# Allegro board RPI_ZM5202.brd
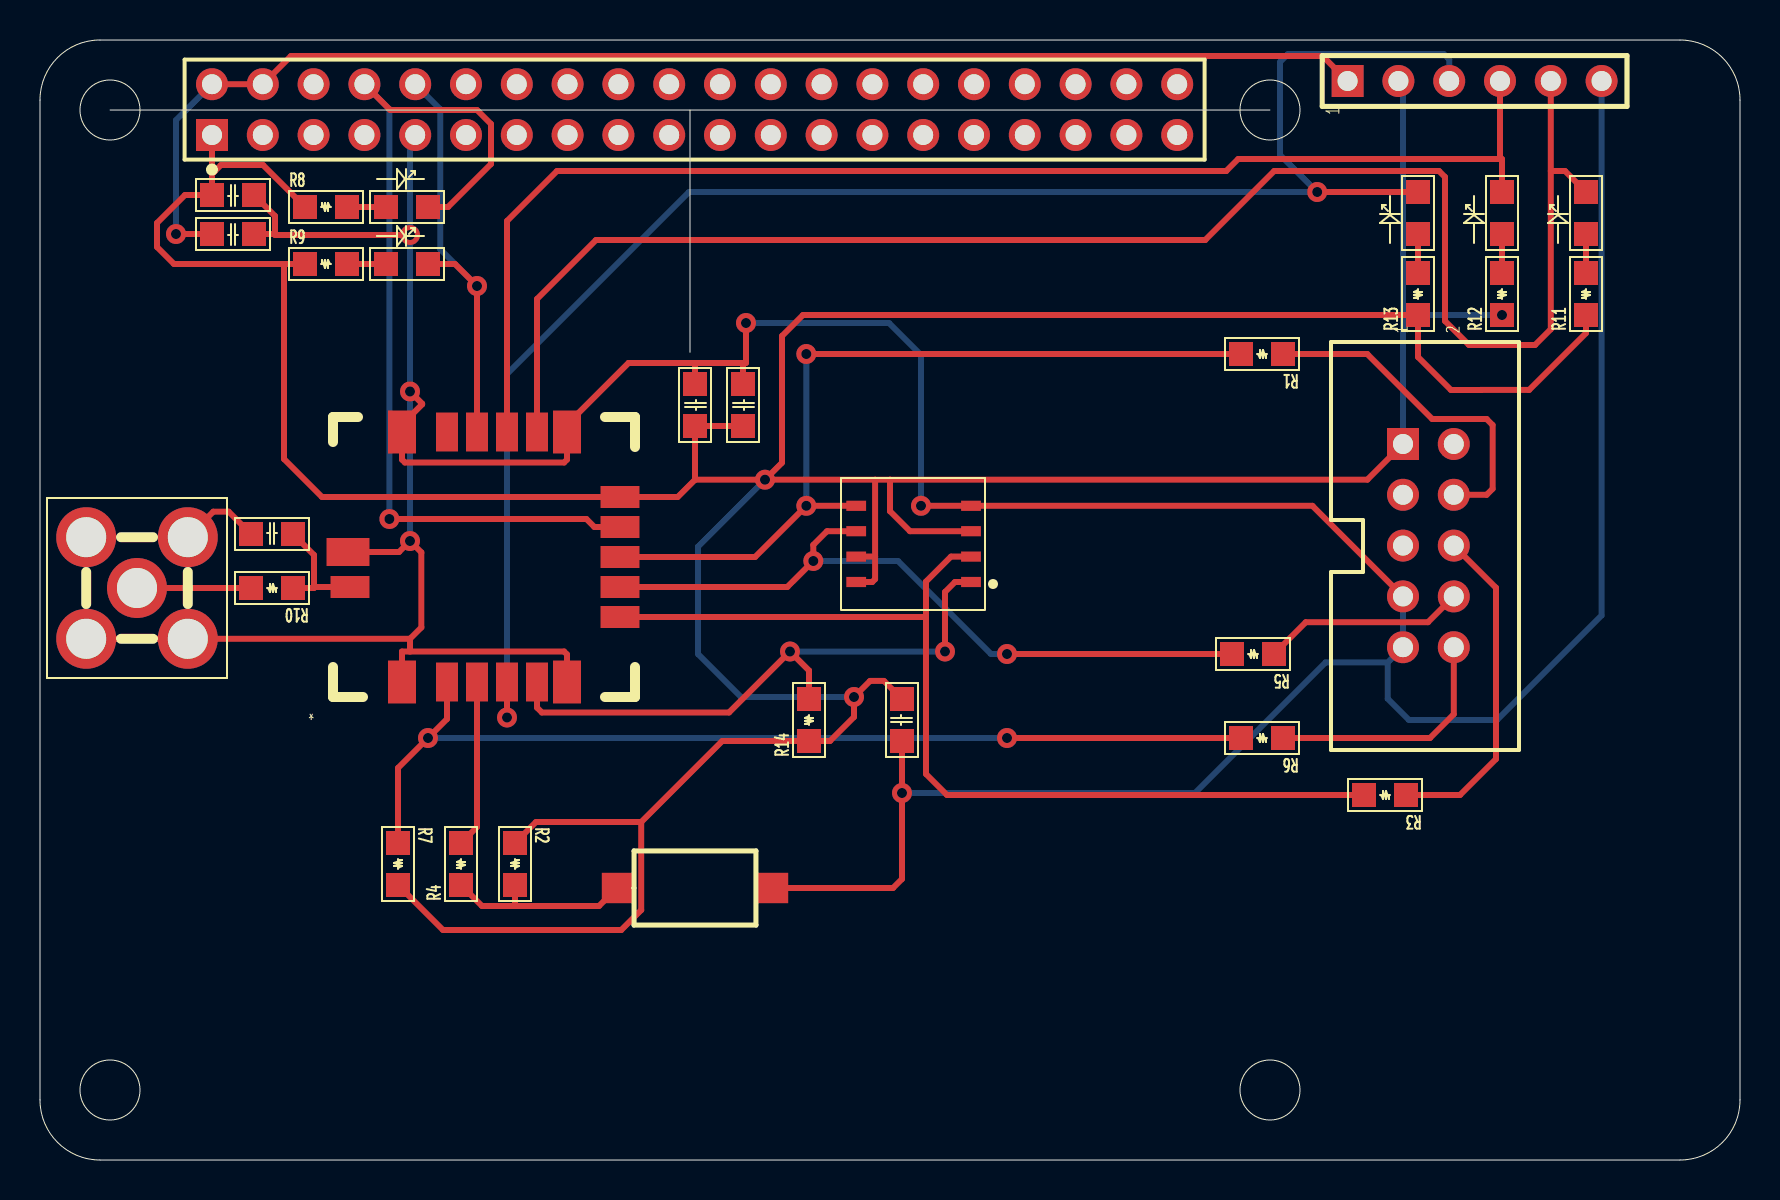
[diagram p0: board, top side]
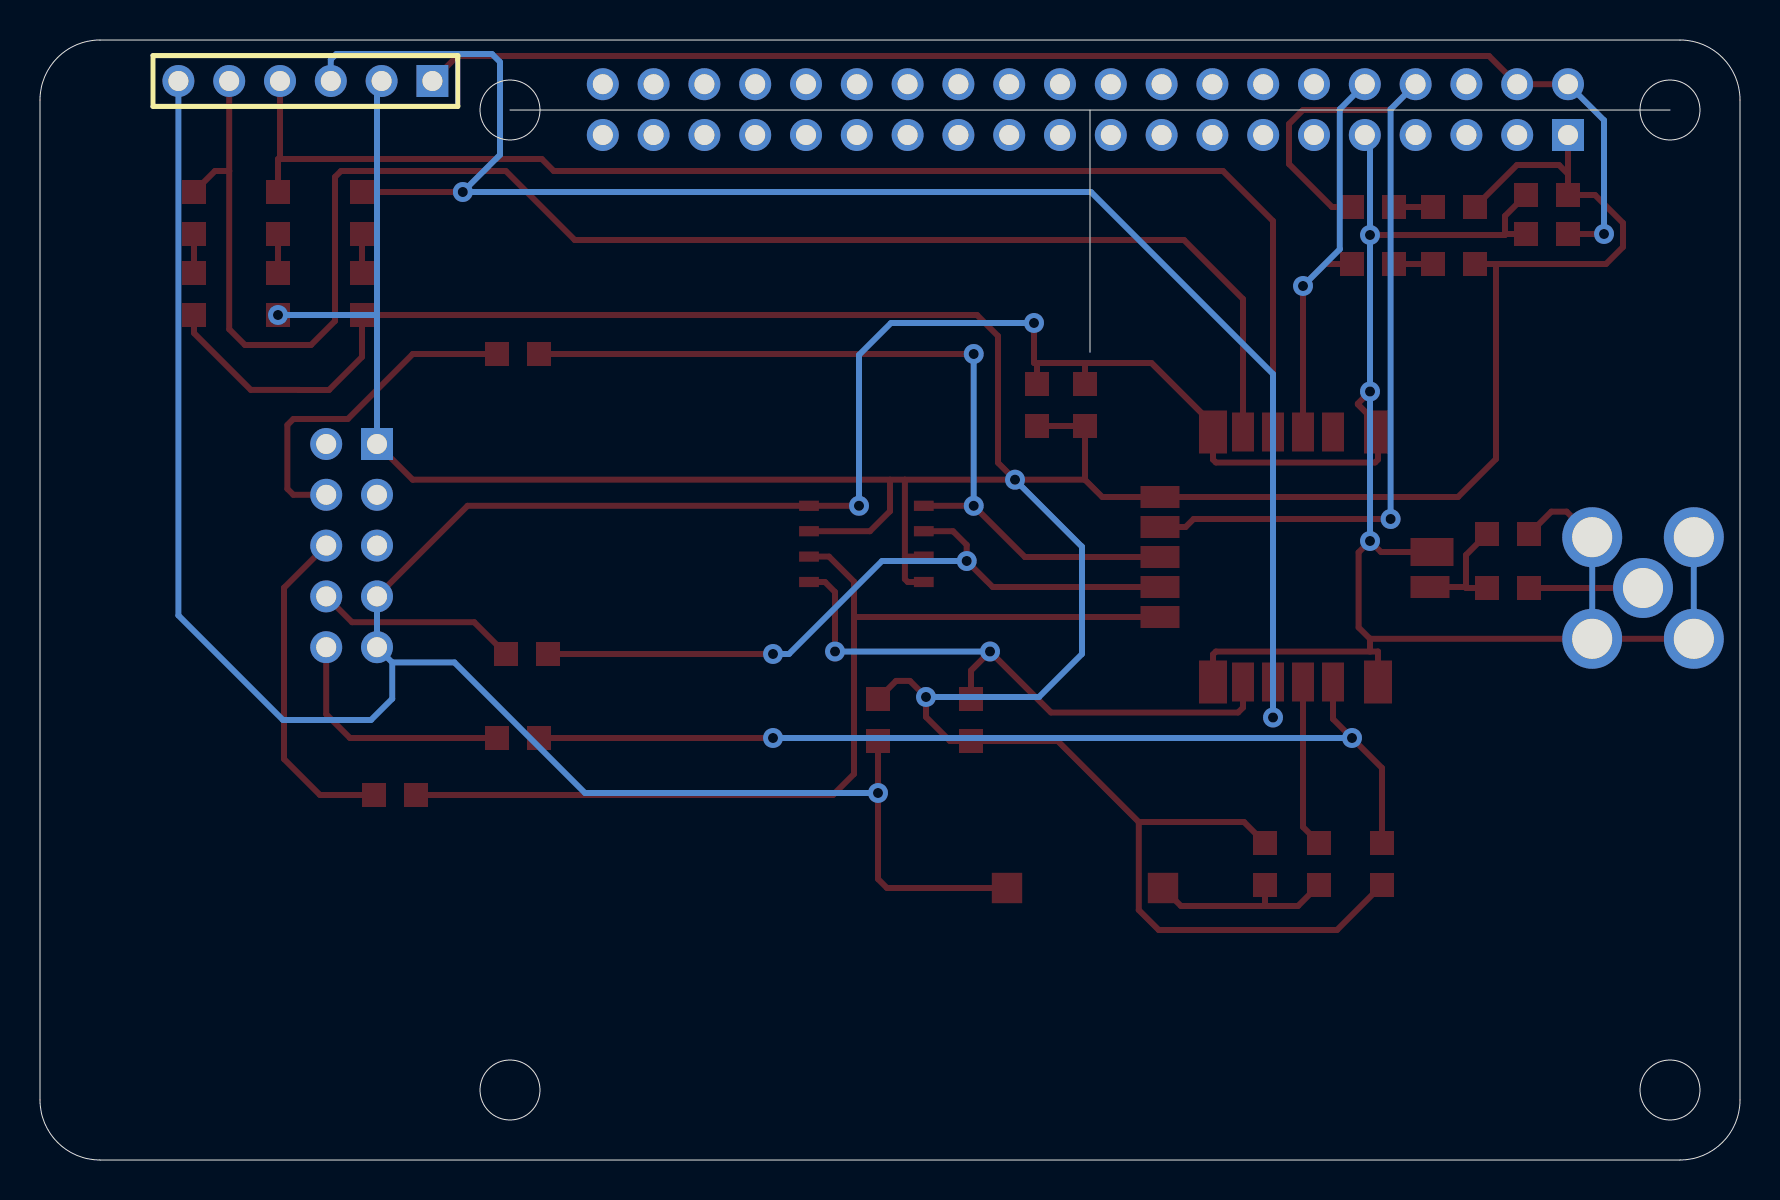
[diagram p1: board, bottom side, seen from below]

Outline 85 x 56 mm; copper layers: TOP, BOTTOM. Coordinates in mm from the lower left corner of the outline.
Outline path: circle c3.5,52.5 r1.5 ; circle c3.5,3.5 r1.5 ; circle c61.5,52.5 r1.5 ; circle c61.5,3.5 r1.5 ; 3.5,52.5 61.5,52.5 ; 32.5,52.5 32.5,40.38 ; 0,53 arc(0.88,55.12) 3,56 82,56 arc(84.12,55.12) 85,53 85,3 arc(84.12,0.88) 82,0 3,0 arc(0.88,0.88) 0,3 0,53

## Design rules (mm)
constraint set DEFAULT: min track width 0.3, pair gap 1

## Placement (name value [footprint] x y rotation side)
C1  33pF  [CAP_SMD_0805]  12.65 31.3 180 top
C2  33nF  [CAP_SMD_0805]  35.15 36.7 90 top
C3  4.7uF  [CAP_SMD_0805]  32.75 36.7 90 top
C4  100nF  [CAP_SMD_0805]  8.6 48.25 0 top
C5  100nF  [CAP_SMD_0805]  8.6 46.3 0 top
C6  33nF  [CAP_SMD_0805]  43.1 23.05 270 top
D1  TX LED  [LED_SMD_0805]  19.4 47.65 180 top
D2  RX LED  [LED_SMD_0805]  19.4 44.8 180 top
D3  TRIAC LED  [LED_SMD_0805]  77.3 48.4 270 top
D4  ZEROX LED  [LED_SMD_0805]  73.1 48.4 270 top
D5  PWM LED  [LED_SMD_0805]  68.9 48.4 270 top
J1  ZWAVE ISP  [HEADER5X2X254]  68.15 35.8 90 top
J2  GPIO  [J1_6_254]  66.65 53.95 0 top
J3  RPI_HEADER  [J2_40_254]  8.6 51.25 0 top
R1  27R  [RES_SMD_0805]  62.15 40.3 180 top
R2  10K  [RES_SMD_0805]  23.75 15.85 270 top
R3  27R  [RES_SMD_0805]  68.3 18.25 180 top
R4  1K  [RES_SMD_0805]  21.05 13.75 90 top
R5  27R  [RES_SMD_0805]  61.7 25.3 180 top
R6  27R  [RES_SMD_0805]  62.15 21.1 180 top
R7  10K  [RES_SMD_0805]  17.9 15.85 270 top
R8  330R  [RES_SMD_0805]  13.25 47.65 0 top
R9  330R  [RES_SMD_0805]  13.25 44.8 0 top
R10  0R  [RES_SMD_0805]  12.65 28.6 180 top
R11  330R  [RES_SMD_0805]  77.3 42.25 90 top
R12  330R  [RES_SMD_0805]  73.1 42.25 90 top
R13  330R  [RES_SMD_0805]  68.9 42.25 90 top
R14  10K  [RES_SMD_0805]  38.45 20.95 90 top
SW1  SW_PB_SPST  [SMD_2PIN_BUTTON]  32.75 13.6 0 top
U1  ZM5202AU-CME3R  [ZM5202]  29 36.4 180 top
U2  5-1814832-1  [RF_ANTENA]  4.85 28.6 90 top
U3  25LC128-I/SN  [SOIC_8]  46.55 28.9 90 top

## Library data of the parts
C1-C6 = CAPACITOR NON-POL
D1-D5 = LED
J1 = CON10
J2 = CON6
J3 = RPI_HEADER
R1-R14 = R
SW1 = SW_PB_SPST
U1 = ZM5202
U2 = RF-Antena
U3 = SPI EPPROM SOIC-8

## Footprints (pads in the part's own frame, mm; a bottom-side part is the same pattern mirrored in y, then rotated)
CAP_SMD_0805
  rect 1.2x1.2 smd: 1(0,0) 2(2.1,0)
HEADER5X2X254
  rect 1.6x1.6 hole 1: 1(0,0)
  round 1.6 hole 1: 2(0,-2.54) 3(-2.54,0) 4(-2.54,-2.54) 5(-5.08,0) 6(-5.08,-2.54) 7(-7.62,0) 8(-7.62,-2.54) 9(-10.16,0) 10(-10.16,-2.54)
J1_6_254
  rect 1.6x1.6 hole 1: 1(-1.27,0)
  round 1.6 hole 1: 2(1.27,0) 3(3.81,0) 4(6.35,0) 5(8.89,0) 6(11.43,0)
J2_40_254
  rect 1.6x1.6 hole 1: 1(0,0)
  round 1.6 hole 1: 2(0,2.54) 3(2.54,0) 4(2.54,2.54) 5(5.08,0) 6(5.08,2.54) 7(7.62,0) 8(7.62,2.54) 9(10.16,0) 10(10.16,2.54) 11(12.7,0) 12(12.7,2.54) 13(15.24,0) 14(15.24,2.54) 15(17.78,0) 16(17.78,2.54) 17(20.32,0) 18(20.32,2.54) 19(22.86,0) 20(22.86,2.54) 21(25.4,0) 22(25.4,2.54) 23(27.94,0) 24(27.94,2.54) 25(30.48,0) 26(30.48,2.54) 27(33.02,0) 28(33.02,2.54) 29(35.56,0) 30(35.56,2.54) 31(38.1,0) 32(38.1,2.54) 33(40.64,0) 34(40.64,2.54) 35(43.18,0) 36(43.18,2.54) 37(45.72,0) 38(45.72,2.54) 39(48.26,0) 40(48.26,2.54)
LED_SMD_0805
  rect 1.2x1.2 smd: 1(0,0) 2(2.1,0)
RES_SMD_0805
  rect 1.2x1.2 smd: 1(0,0) 2(2.1,0)
RF_ANTENA
  round 3 hole 2: 1(0,0) 2(-2.54,2.54) 3(2.54,2.54) 4(2.54,-2.54) 5(-2.54,-2.54)
SMD_2PIN_BUTTON
  rect 1.524x1.524 smd: 1(-3.9,0) 2(3.9,0)
SOIC_8
  rect 0.51x0.99 smd: 1(0,0) 2(1.27,0) 3(2.54,0) 4(3.81,0) 5(3.81,5.74) 6(2.54,5.74) 7(1.27,5.74) 8(0,5.74)
ZM5202
  rect 1.4x2.15 smd: 1(10.9,12.5) 6(2.65,12.5) 12(2.65,0) 17(10.9,0)
  rect 1.1x1.95 smd: 2(8.65,12.5) 3(7.15,12.5) 4(5.65,12.5) 5(4.15,12.5) 13(4.15,0) 14(5.65,0) 15(7.15,0) 16(8.65,0)
  rect 1.95x1.1 smd: 7(0,9.25) 8(0,7.75) 9(0,6.25) 10(0,4.75) 11(0,3.25) 19(13.5,7.75)
  rect 2.15x1.4 smd: 18(13.6,6)

## Nets
3V3: C2.1 C3.1 C4.1 C6.1 J1.1 J2.2 J3.1 R2.1 R7.2 R8.1 R9.1 R11.1 R12.1 R13.1 R14.1 U1.11 U3.3(W\P) U3.7 U3.8
5V: C5.1 J2.1 J3.2 J3.4
GND: C1.2 C2.2 C3.2 C4.2 C5.2 C6.2 J1.7 J1.9 J2.6 J3.9 SW1.2 U1.1 U1.6 U1.12 U1.17 U1.18 U2.2 U2.3 U2.4 U2.5 U3.4
MISO: R3.2 U1.7 U3.2
MOSI: R1.2 U1.9 U3.5
P1.5: R14.2 U1.5 U3.1
PWM: D5.1(CATHODE) J2.3 U1.4
RPI_RX: D2.1(CATHODE) J3.10 U1.15
RPI_TX: D1.1(CATHODE) J3.8 U1.10
SCK: R5.2 U1.8 U3.6
TRIAC: D3.1(CATHODE) J2.5 U1.13
ZEROX: D4.1(CATHODE) J2.4 U1.14
ZWAVE_RESET: R6.2 R7.1 U1.2
N49001: R2.2 R4.1 SW1.1
N49085: R4.2 U1.3
N49201: C1.1 R10.1 U1.19
N49209: R10.2 U2.1(RF)
N406093: J1.4 R1.1
N406095: J1.6 R3.1
N406097: J1.8 R5.1
N406099: J1.10 R6.1
N463171: D1.2 R8.2
N463331: D2.2 R9.2
N493031: D3.2 R11.2
N493191: D4.2 R12.2
N493351: D5.2 R13.2

Pads without a net: J1 2 3 5; J3 3 5 6 7 11 12 13 14 15 16 17 18 19 20 21 22 23 24 25 26 27 28 29 30 31 32 33 34 35 36 37 38 39 40; U1 16

## Via types
v1: diameter 1, hole 0.5, TOP to BOTTOM, 22 vias

## Routing (per net, layer and track width the routed paths; a pad name or vN(x,y) marks a point on that pad's centre or on a via; arc(x,y) is an arc through that point)
3V3: length 243.2
  TOP w0.3: 8.6,49.3 C4.1 7.25,48.25 5.85,46.85 5.85,45.65 6.7,44.8 12.2,44.8 ; 8.6,49.3 9.05,49.75 11.15,49.75 R8.1 ; 8.6,49.3 J3.1 ; 12.2,44.8 12.2,35.05 14.1,33.15 U1.11 31.88,33.15 32.75,34.02 ; 12.2,44.8 R9.1 ; J1.1 66.36,34.02 42.5,34.02 ; 42.5,34.02 41.76,34.02 ; 42.5,34.02 42.5,32.44 43.5,31.44 U3.3 ; v1(36.25,34.02) 37.1,34.87 37.1,41.2 38.15,42.25 R13.1 68.9,40.15 70.55,38.5 72.04,38.5 72.05,38.5 74.46,38.5 77.3,41.35 R11.1 ; v1(36.25,34.02) 32.75,34.02 ; v1(36.25,34.02) 41.76,34.02 ; R7.2 20.15,11.5 29.06,11.5 30.06,12.5 30.06,16.9 ; 41.76,30.17 41.76,29.05 41.61,28.9 U3.8 ; 41.76,30.17 41.76,34.02 ; 41.76,30.17 U3.7 ; 32.75,34.02 C3.1 C2.1 ; 30.06,16.9 34.11,20.95 R14.1 39.5,20.95 40.7,22.15 v1(40.7,23.15) 41.5,23.95 42.2,23.95 C6.1 ; 30.06,16.9 24.8,16.9 R2.1
  BOTTOM w0.3: 68.15,42.25 J1.1 ; 68.15,42.25 68.15,53.72 J2.2 ; 68.15,42.25 v1(73.1,42.25) ; v1(36.25,34.02) 32.9,30.66 32.9,25.3 35.05,23.15 v1(40.7,23.15)
5V: length 67.9
  TOP w0.3: J3.2 J3.4 12.55,55.2 64.13,55.2 J2.1 ; C5.1 v1(6.8,46.3)
  BOTTOM w0.3: J3.2 6.8,51.99 v1(6.8,46.3)
GND: length 239.1
  TOP w0.3: U1.1 18.1,25.43 18.5,25.43 ; 35.15,39.85 32.75,39.85 ; 35.15,39.85 C2.2 ; 35.15,39.85 35.3,39.85 v1(35.3,41.85) ; 32.75,39.85 C3.2 ; 32.75,39.85 29.43,39.85 26.35,36.77 U1.12 26.35,35.02 26.2,34.88 18.25,34.88 18.1,35.02 U1.17 18.1,36.77 19.1,37.78 19.1,37.82 v1(18.5,38.42) ; 18.5,26.06 19.07,26.63 19.07,30.38 v1(18.5,30.95) 17.95,30.4 U1.18 ; 18.5,26.06 U2.5 U2.2 ; 18.5,26.06 18.5,25.43 ; 11.75,46.3 11.75,46.25 v1(18.5,46.25) ; 11.75,46.3 11.75,47.2 C4.2 ; 11.75,46.3 C5.2 ; C1.2 9.43,32.42 8.67,32.42 U2.4 ; 18.5,25.43 26.2,25.43 26.35,25.28 U1.6 ; v1(44.05,32.71) U3.4 63.62,32.71 J1.7 ; C6.2 v1(43.1,18.35) 43.1,14.05 42.65,13.6 SW1.2
  BOTTOM w0.3: 67.39,24.88 67.39,23.06 68.45,22 72.85,22 78.08,27.23 J2.6 ; 67.39,24.88 J1.9 J1.7 ; 67.39,24.88 64.28,24.88 57.75,18.35 v1(43.1,18.35) ; v1(44.05,32.71) 44.05,40.25 42.45,41.85 v1(35.3,41.85) ; J3.9 18.5,50.99 v1(18.5,46.25) v1(18.5,38.42) v1(18.5,30.95) ; U2.3 U2.2 ; U2.5 U2.4
MISO: length 50
  TOP w0.3: 44.3,27.15 44.3,19.3 45.35,18.25 R3.2 ; 44.3,27.15 44.3,28.92 45.55,30.17 U3.2 ; 44.3,27.15 U1.7
MOSI: length 42.2
  TOP w0.3: U3.5 v1(38.31,32.71) 35.76,30.15 U1.9 ; R1.2 v1(38.31,40.3)
  BOTTOM w0.3: v1(38.31,40.3) v1(38.31,32.71)
P1.5: length 30.3
  TOP w0.3: R14.2 38.45,24.47 v1(37.5,25.42) 34.45,22.38 25.1,22.38 24.85,22.62 U1.5 ; U3.1 45.75,28.9 45.25,28.4 v1(45.25,25.42)
  BOTTOM w0.3: v1(37.5,25.42) v1(45.25,25.42)
PWM: length 85.4
  TOP w0.3: U1.4 v1(23.35,22.12) ; D5.1 v1(63.86,48.4)
  BOTTOM w0.3: v1(23.35,22.12) 23.35,39.3 32.45,48.4 v1(63.86,48.4) 62,50.26 62,54.9 62.4,55.3 70.19,55.3 70.46,55.03 J2.3
RPI_RX: length 21.6
  TOP w0.3: U1.15 v1(21.85,43.7) 20.75,44.8 D2.1
  BOTTOM w0.3: v1(21.85,43.7) 20.01,45.54 20.01,52.54 J3.10
RPI_TX: length 47.1
  TOP w0.3: J3.8 17.51,52.5 21.85,52.5 22.55,51.8 22.55,49.8 20.4,47.65 D1.1 ; U1.10 27.72,31.65 27.32,32.05 v1(17.47,32.05)
  BOTTOM w0.3: J3.8 17.47,52.54 v1(17.47,32.05)
SCK: length 36.3
  TOP w0.3: R5.2 v1(48.35,25.3) ; U1.8 37.36,28.65 v1(38.66,29.95) 38.66,30.75 39.35,31.44 U3.6
  BOTTOM w0.3: v1(48.35,25.3) 47.55,25.3 42.9,29.95 v1(38.66,29.95)
TRIAC: length 82.7
  TOP w0.3: D3.1 76.25,49.45 75.54,49.45 ; 75.54,49.45 75.54,41.54 74.75,40.75 71.45,40.75 70.25,41.95 70.25,49.15 69.95,49.45 61.71,49.45 58.26,46 27.8,46 24.85,43.05 U1.13 ; 75.54,49.45 J2.5
ZEROX: length 67.1
  TOP w0.3: U1.14 23.35,46.95 25.85,49.45 59.31,49.45 59.91,50.05 73,50.05 ; 73,50.05 J2.4 ; 73,50.05 73.1,50.05 D4.1
ZWAVE_RESET: length 49.7
  TOP w0.3: U1.2 20.35,22.05 v1(19.4,21.1) 17.9,19.6 R7.1 ; R6.2 v1(48.35,21.1)
  BOTTOM w0.3: v1(48.35,21.1) v1(19.4,21.1)
N49001: length 9.7
  TOP w0.3: SW1.1 27.95,12.7 23.75,12.7 ; 23.75,12.7 22.1,12.7 R4.1 ; 23.75,12.7 R2.2
N49085: length 8.4
  TOP w0.3: R4.2 21.85,16.65 U1.3
N49201: length 6
  TOP w0.3: R10.1 13.7,28.6 13.7,28.65 ; C1.1 13.7,30.25 13.7,28.65 ; 13.7,28.65 U1.19
N49209: length 5.7
  TOP w0.3: R10.2 U2.1
N406093: length 17.2
  TOP w0.3: J1.4 72.33,33.26 72.63,33.56 72.63,36.75 72.33,37.05 69.61,37.05 66.36,40.3 R1.1
N406095: length 16.8
  TOP w0.3: R3.1 71,18.25 72.8,20.05 72.8,28.61 J1.6
N406097: length 10.2
  TOP w0.3: J1.8 69.4,26.89 63.29,26.89 R5.1
N406099: length 12.4
  TOP w0.3: J1.10 70.69,22.29 69.5,21.1 R6.1
N463171: length 1.9
  TOP w0.3: R8.2 D1.2
N463331: length 1.9
  TOP w0.3: R9.2 D2.2
N493031: length 1.9
  TOP w0.3: D3.2 R11.2
N493191: length 1.9
  TOP w0.3: D4.2 R12.2
N493351: length 1.9
  TOP w0.3: D5.2 R13.2
